# Altium PCB Board.PcbDoc
Units mm, origin at the board's own origin, x right, y up, seen from the top; angles counter-clockwise.
Board outline 74.9 x 75 mm, 2 copper layers (Top Layer, Bottom Layer); 40 components, 43 nets, 168 pads, 0 vias.
Unrouted connection lines stored in the file: 103.
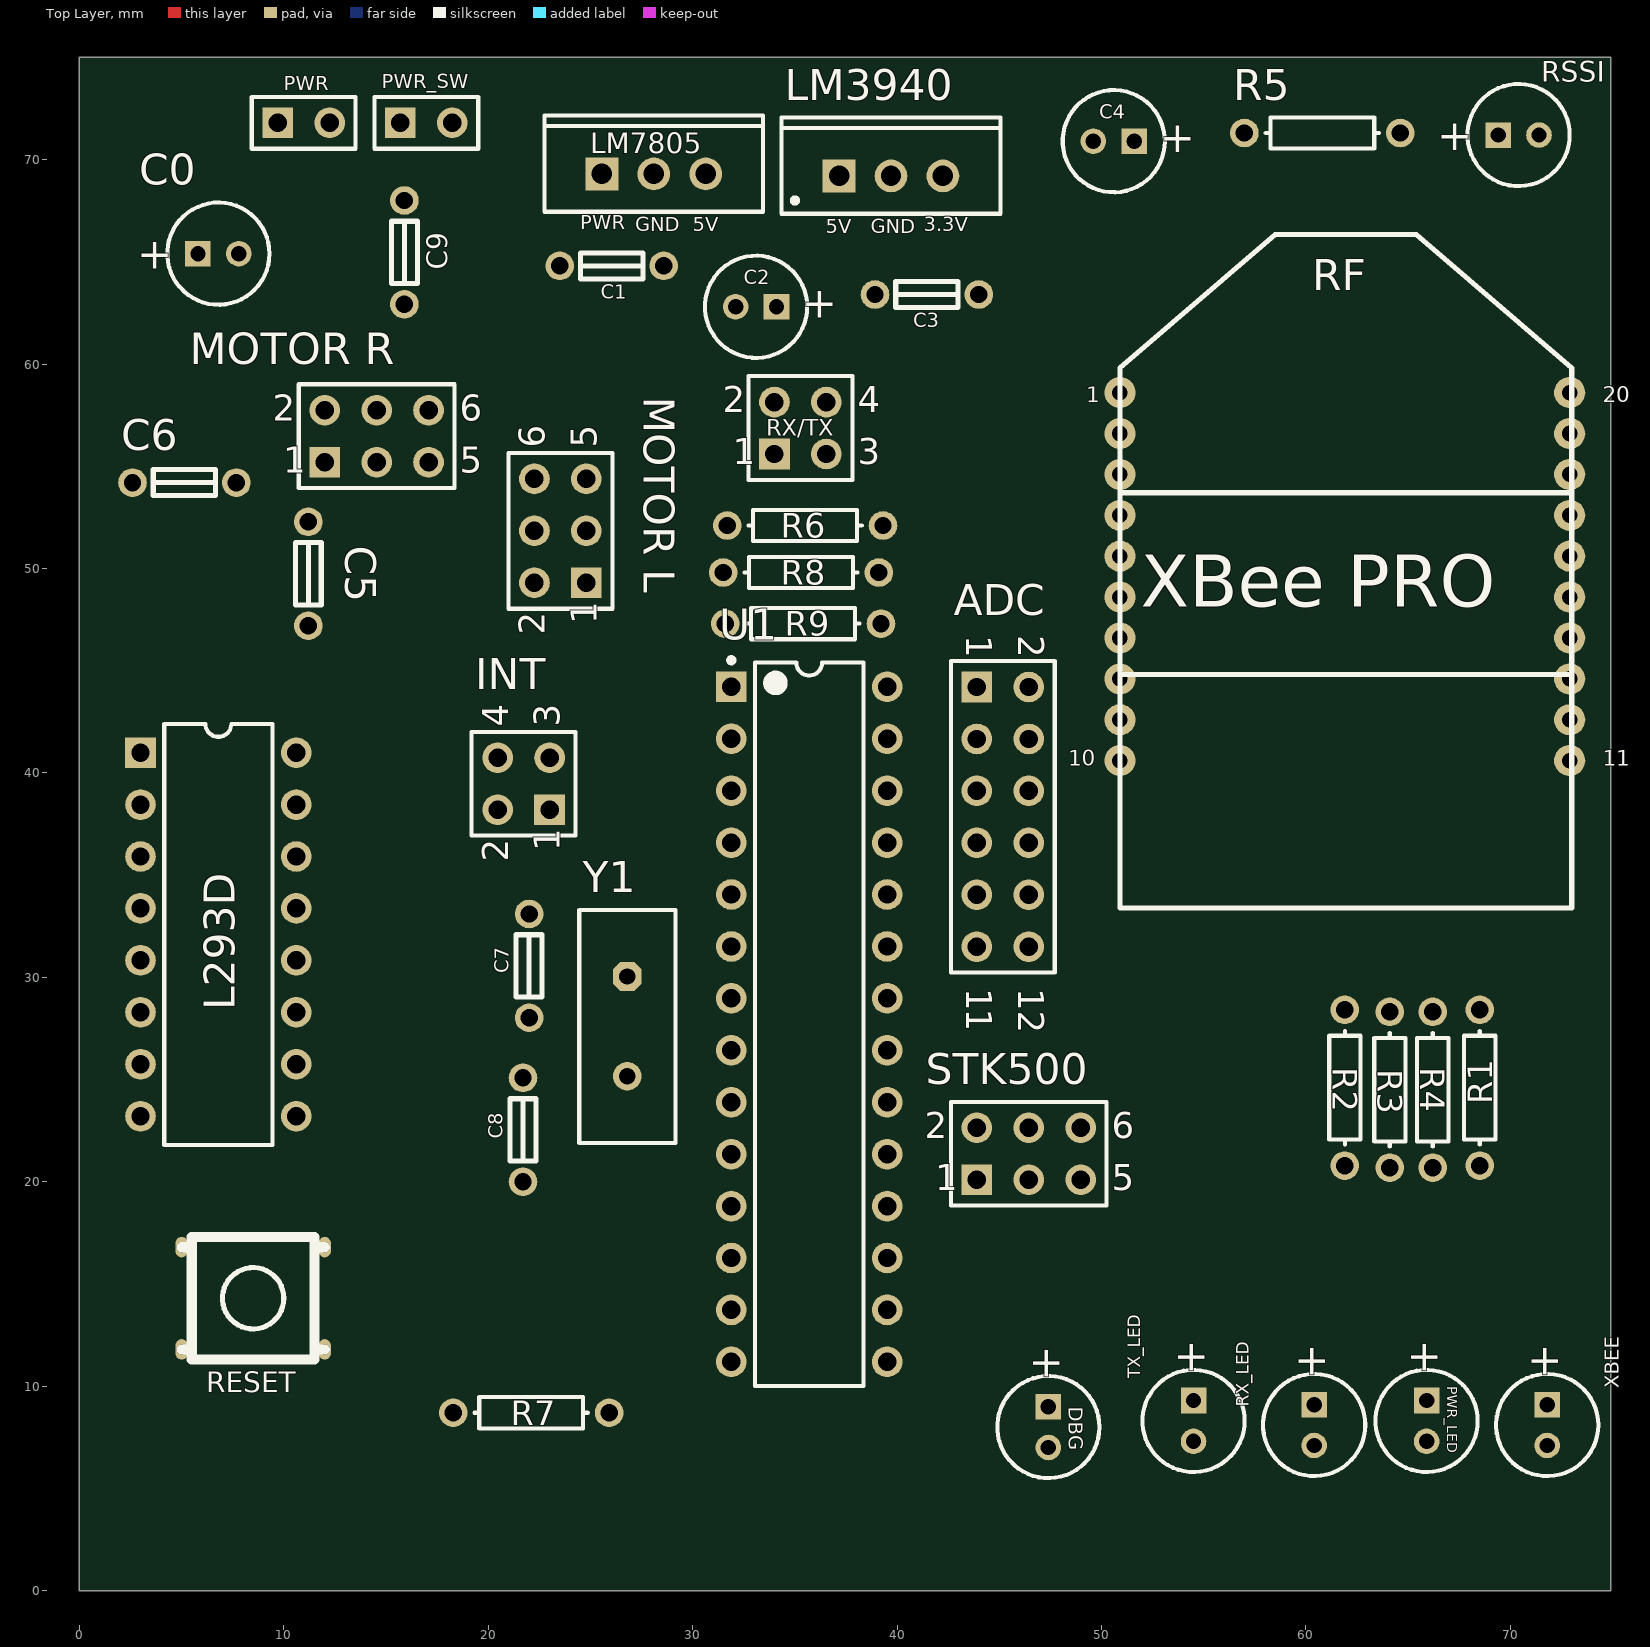
[diagram p0: Top Layer view]
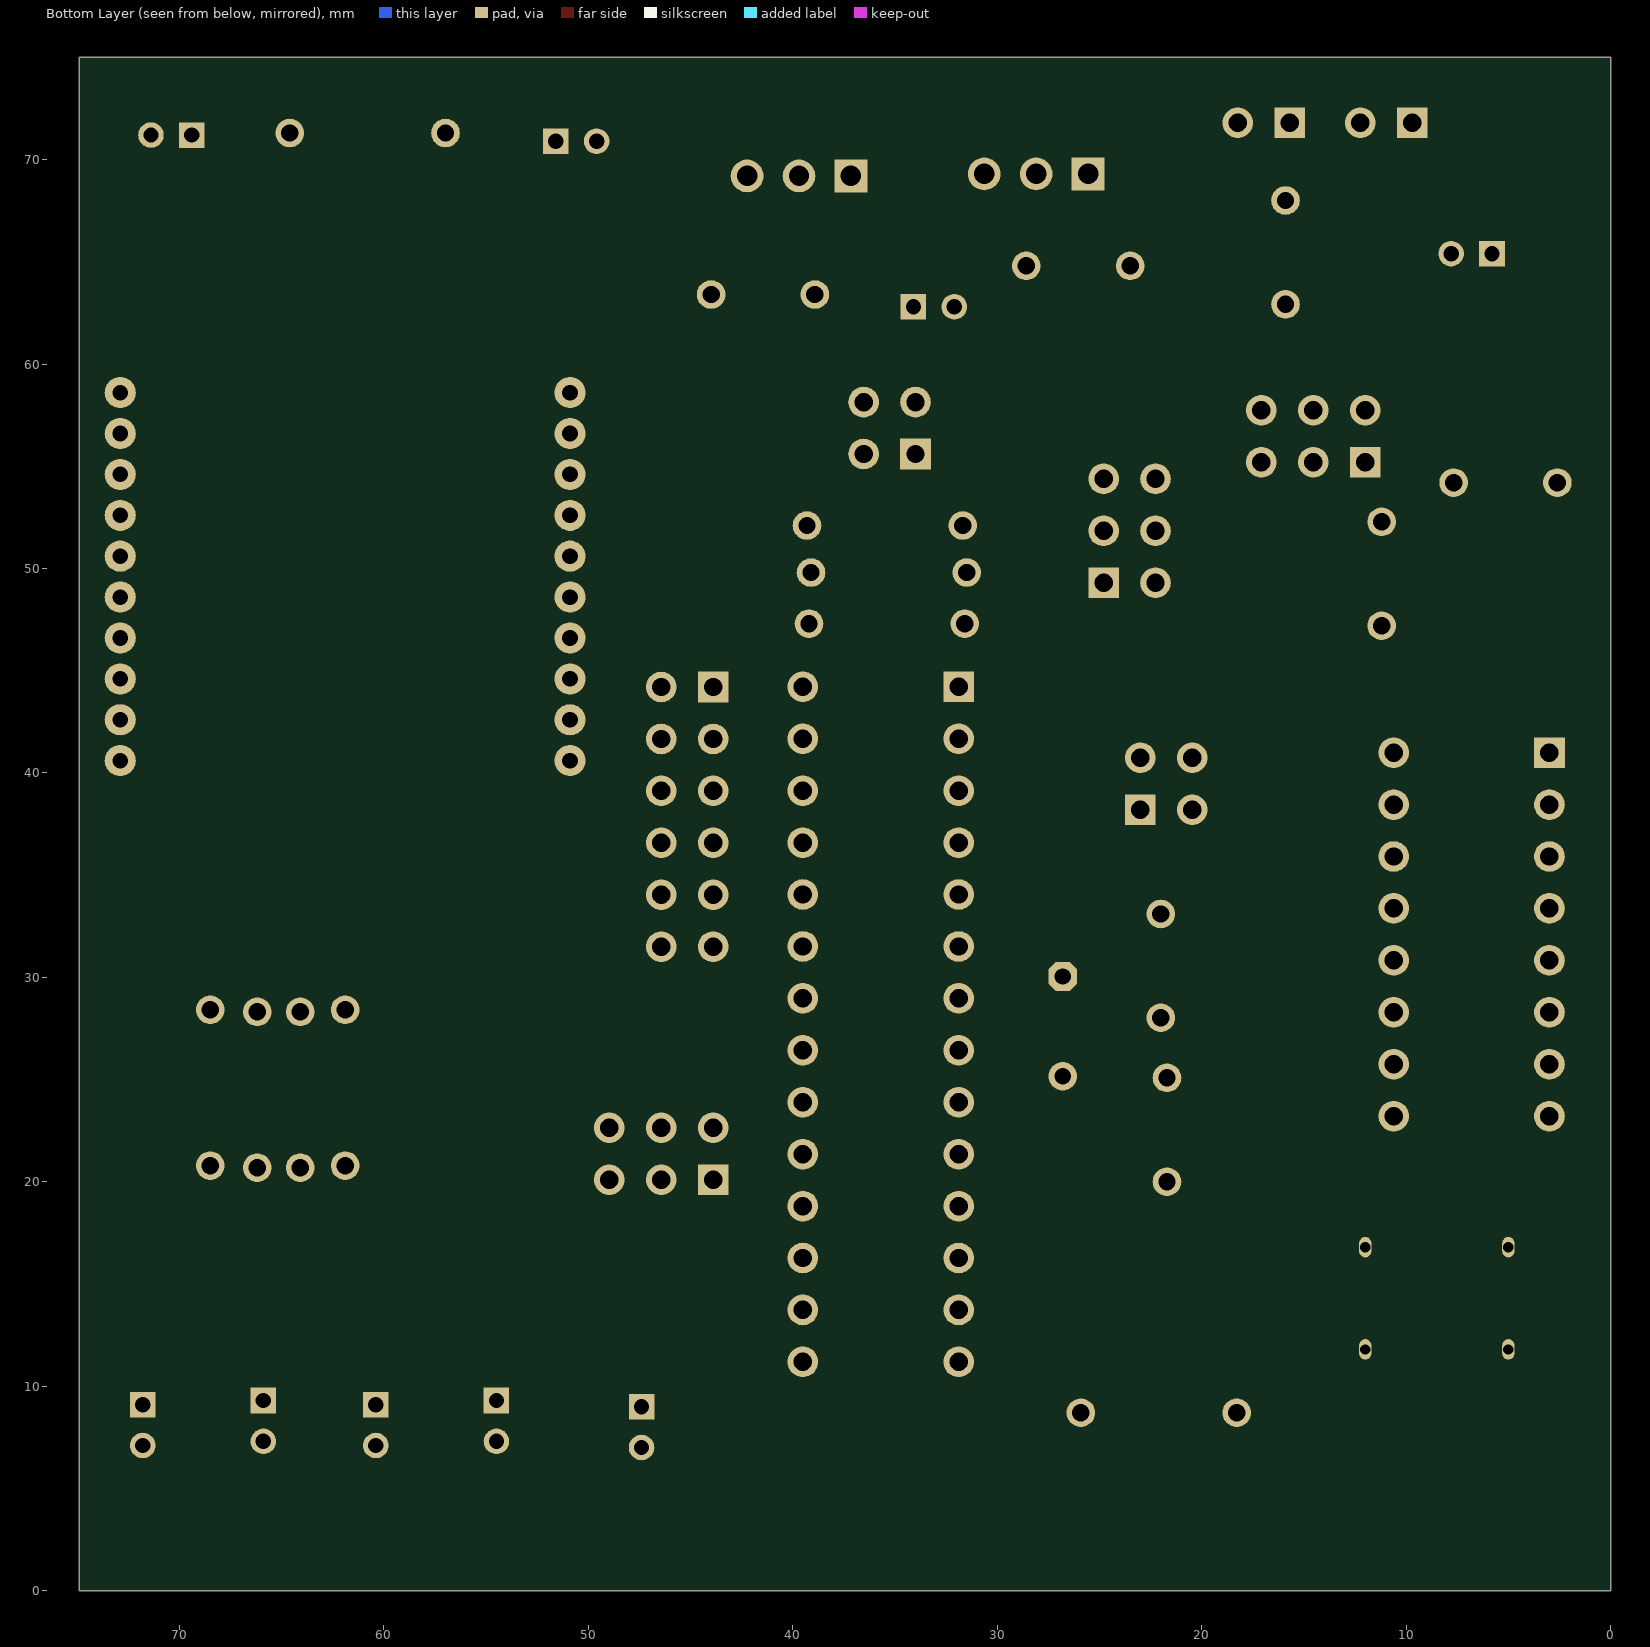
[diagram p1: Bottom Layer view, seen from below]

## Layer stack, top to bottom
Top Layer: signal copper 0.0356
Dielectric: dielectric 0.32, FR-4, Dk 4.8
Bottom Layer: signal copper 0.0356

## Board outline
0,0 0,75 74.9,75 74.9,0

## Design rules (kind name [scope] priority, off if disabled: settings)
Clearance [All] p1: gap=0.254
PolygonConnect [All] p1: connectstyle=Relief reliefconductorwidth=0.254 reliefentries=4 polygonreliefangle="90 Angle"
RoomDefinition Esquemático [InComponentClass('Esquemático')] p1: confinementstyle=ConfineIn formatcopy=TRUE lockcomponents=FALSE outline -5,-5 80,-5 80,80 -5,80
RoutingVias [All] p1: holewidth=0.711 width=1.27 viastyle="Through Hole" minholewidth=0.711 minwidth=1.27 maxholewidth=0.711 maxwidth=1.27
SilkscreenOverComponentPads [All] p1: minsilkscreentomaskgap=0.254
SolderMaskExpansion [All] p1: expansion=0.102
Width [All] p1: maxlimit=0.254 minlimit=0.254 preferedwidth=0.254
27 further rules are at their usual default settings.

## Components (designator, comment, footprint, x,y, rotation, side; value= is the part's Value field where it differs from the comment)
ADC "Header 6X2" HDR2X6 43.9,44.2 r270 top
C0 "Cap Pol1" B 6.8,65.4 r0 top
C1 "Cap" C_NANO_HOLES 23.5,64.8 r0 top
C2 "Cap Pol1" B 33.1,62.8 r180 top
C3 "Cap" C_NANO_HOLES 44,63.4 r180 top
C4 "Cap Pol1" B 50.6,70.9 r180 top
C5 "Cap" C_NANO_HOLES 11.2,47.2 r90 top
C6 "Cap" C_NANO_HOLES 2.6,54.2 r0 top
C7 "Cap" C_NANO_HOLES 22,33.1 r270 top
C8 "Cap" C_NANO_HOLES 21.7,20 r90 top
C9 "Cap" C_NANO_HOLES 15.9,68 r270 top
DBG "LED0" B 47.4,8 r270 top
INT "Header 2X2" HDR2X2 23,38.2 r90 top
L293D "L293D" DIP16 6.8,32.1 r270 top
LM3940 "LM3940IT-3.3" T03B 39.7,69.2 r0 top
LM7805 "µA7805CKC" KC03 28.1,69.3 r0 top
"MOTOR L" "Header 3X2 (2mm)" HDR2X3 24.8,49.3 r90 top
"MOTOR R" "Header 3X2 (2mm)" HDR2x3 12,55.2 r0 top
PWR "Header 2" HDR1X2 9.7,71.8 r0 top
PWR_LED "LED0" B 65.9,8.3 r270 top
PWR_SW "Header 2" HDR1X2 15.7,71.8 r0 top
R1 "" AXIAL-0.3 68.5,24.6 r270 top
R2 "" AXIAL-0.3 61.9,24.6 r270 top
R3 "" AXIAL-0.3 64.1,24.5 r270 top
R4 "" AXIAL-0.3 66.2,24.5 r270 top
R5 "" AXIAL-0.3 60.8,71.3 r0 top
R6 "" AXIAL-0.3 35.5,52.1 r180 top
R7 "" AXIAL-0.3 22.1,8.7 r180 top
R8 "" AXIAL-0.3 35.3,49.8 r180 top
R9 "" AXIAL-0.3 35.4,47.3 r180 top
RESET "SW-PB" PUSHBUTTON 11.5,17.3 r180 top
RF "XBee Pro 60mW" XBEE_PRO 50.9,40.6 r0 top
RSSI "LED0" B 70.4,71.2 r0 top
RX/TX "Header 2X2" HDR2X2 34,55.6 r0 top
RX_LED "LED0" B 60.4,8.1 r270 top
STK500 "Header 3X2" HDR2X3 43.9,20.1 r0 top
TX_LED "LED0" B 54.5,8.3 r270 top
U1 "ATmega8-16PI" 28P3 35.7,27.7 r0 top
XBEE "LED0" B 71.8,8.1 r270 top
Y1 "16MHz" HC-49U 26.8,27.6 r270 top

## Footprints (in the part's own frame and the unit in brackets; to place one, negate y for a bottom-side part, rotate by r counter-clockwise, add the part's x,y. Pads: shape width x height; smd on the part's side, far side on the other; paste and mask are expansions set on the pad)
28P3 [mm] "DIP, 28-Leads, Row Spacing 7.62mm, Pitch 2.54mm, Body 34.67x7.3mm"
  rect 1.5x1.5 hole 0.9: 1(-3.81,16.51)
  round 1.5 hole 0.9: 2(-3.81,13.97) 3(-3.81,11.43) 4(-3.81,8.89) 5(-3.81,6.35) 6(-3.81,3.81) 7(-3.81,1.27) 8(-3.81,-1.27) 9(-3.81,-3.81) 10(-3.81,-6.35) 11(-3.81,-8.89) 12(-3.81,-11.43) 13(-3.81,-13.97) 14(-3.81,-16.51) 15(3.81,-16.51) 16(3.81,-13.97) 17(3.81,-11.43) 18(3.81,-8.89) 19(3.81,-6.35) 20(3.81,-3.81) 21(3.81,-1.27) 22(3.81,1.27) 23(3.81,3.81) 24(3.81,6.35) 25(3.81,8.89) 26(3.81,11.43) 27(3.81,13.97) 28(3.81,16.51)
  silkscreen extent -3.93,-17.7 2.65,17.93, body extent -3.6,-17.65 3.6,17.65, height 4.58
AXIAL-0.3 [mm] "Axial Device, Thru-Hole; 2 Leads; 0.3 in Pin Spacing"
  round 1.4 hole 0.85: 1(-3.81,0) 2(3.81,0)
  silkscreen extent -2.77,-0.76 2.77,0.76
B [mm] "Capacitor, Electrolytic, Radial; Body 5 x 6.8 mm (Dia.xH typ); Pin Spacing 2 mm (typ)"
  rect 1.25x1.25 hole 0.75: 1(-1,0)
  round 1.25 hole 0.75: 2(1,0)
  silkscreen extent -2.5,-2.5 2.5,2.5
C_NANO_HOLES [mm] "C_NANO com furos maiores"
  round 1.4 hole 0.85: 1(0,0) 2(5.08,0)
  silkscreen extent 1.02,-0.64 4.06,0.64
DIP16 [mm] "DIP; 16 Leads; Row Spacing 7.62 mm; Pitch 2.54 mm"
  rect 1.5x1.5 hole 0.9: 1(-8.89,-3.81)
  round 1.5 hole 0.9: 2(-6.35,-3.81) 3(-3.81,-3.81) 4(-1.27,-3.81) 5(1.27,-3.81) 6(3.81,-3.81) 7(6.35,-3.81) 8(8.89,-3.81) 9(8.89,3.81) 10(6.35,3.81) 11(3.81,3.81) 12(1.27,3.81) 13(-1.27,3.81) 14(-3.81,3.81) 15(-6.35,3.81) 16(-8.89,3.81)
  silkscreen extent -10.3,-2.65 10.3,2.65
HC-49U [mm] "Quartz Crystal, Thru-Hole; 2 Leads; Body 11.35 x 4.65 x 13.46 mm (LxWxH max)"
  oct 1.4x1.4 hole 0.8: 1(-2.44,0)
  round 1.4 hole 0.8: 2(2.44,0)
  silkscreen extent -5.7,-2.35 5.7,2.35
HDR1X2 [mm] "Connector; Header; 2 Position"
  rect 1.5x1.5 hole 0.9: 1(0,0)
  round 1.5 hole 0.9: 2(2.54,0)
  silkscreen extent -1.27,-1.27 3.81,1.27
HDR2X2 [mm] "Connector; Header; 2x2 Position"
  rect 1.5x1.5 hole 0.9: 1(0,0)
  round 1.5 hole 0.9: 2(0,2.54) 3(2.54,0) 4(2.54,2.54)
  silkscreen extent -1.27,-1.27 3.81,3.81
HDR2X3 [mm] "Connector; Header; 3x2 Position"
  rect 1.5x1.5 hole 0.9: 1(0,0)
  round 1.5 hole 0.9: 2(0,2.54) 3(2.54,0) 4(2.54,2.54) 5(5.08,0) 6(5.08,2.54)
  silkscreen extent -1.27,-1.27 6.35,3.81
HDR2x3 [mm] "Connector; Header; 3x2 Position"
  rect 1.5x1.5 hole 0.9: 1(0,0)
  round 1.5 hole 0.9: 2(0,2.54) 3(2.54,0) 4(2.54,2.54) 5(5.08,0) 6(5.08,2.54)
  silkscreen extent -1.27,-1.27 6.35,3.81
HDR2X6 [mm] "Connector; Header; 6x2 Position"
  rect 1.5x1.5 hole 0.9: 1(0,0)
  round 1.5 hole 0.9: 2(0,2.54) 3(2.54,0) 4(2.54,2.54) 5(5.08,0) 6(5.08,2.54) 7(7.62,0) 8(7.62,2.54) 9(10.16,0) 10(10.16,2.54) 11(12.7,0) 12(12.7,2.54)
  silkscreen extent -1.27,-1.27 13.97,3.81
KC03 [mm] "TO, Thru-Hole, Vertical, Heatsink Mounted; 3 In-Line Leads; Pitch 2.54 mm"
  rect 1.6x1.6 hole 1: 1(-2.54,0)
  round 1.6 hole 1: 2(0,0) 3(2.54,0)
  silkscreen extent -5.35,-1.85 5.35,2.85
PUSHBUTTON [mm]
  oval 0.6x1 hole 0.5: 1(-0.5,5.5) 1(-0.5,0.5) 2(6.5,5.5) 2(6.5,0.5)
  silkscreen extent -0.5,0 6.5,6
T03B [mm] "TO, Thru-Hole, Vertical, Heatsink Mounted; 3 In-Line Leads; Pitch 2.54 mm"
  rect 1.6x1.6 hole 1: 1(-2.54,0)
  round 1.6 hole 1: 2(0,0) 3(2.54,0)
  silkscreen extent -5.35,-1.85 5.35,2.85, body extent -5.4,-1.9 5.4,2.9, height 19.4
XBEE_PRO [mil]
  round 60 hole 30: 1(0,708.66) 2(0,629.92) 3(0,551.18) 4(0,472.44) 5(0,393.7) 6(0,314.96) 7(0,236.22) 8(0,157.48) 9(0,78.74) 10(0,0) 11(866.14,0) 12(866.14,78.74) 13(866.14,157.48) 14(866.14,236.22) 15(866.14,314.96) 16(866.14,393.7) 17(866.14,472.44) 18(866.14,551.18) 19(866.14,629.92) 20(866.14,708.66)
  silkscreen extent 0,-284 870,1013

## Part data
ADC: "Header, 6-Pin, Dual row"
C0 C2 C4: "Polarized Capacitor (Radial)"
C1 C3 C5 C6 C7 C8 C9: "Capacitor"
DBG PWR_LED RSSI RX_LED TX_LED XBEE: "Typical INFRARED GaAs LED"
INT RX/TX: "Header, 2-Pin, Dual row"
L293D: "Push-Pull Four Channel Driver With Diode"
LM3940: "1A Low Dropout Regulator for 5V to 3.3V Conversion"
LM7805: "Positive-Voltage Regulator"
"MOTOR L" "MOTOR R": library part "Header 3X2", "Header, 3-Pin, Dual row"
PWR PWR_SW: "Header, 2-Pin"
R1 R2 R3 R4 R5 R6 R7 R8 R9: library part Res1, "Resistor"
RESET: "Switch"
RF: library part XBee
STK500: "Header, 3-Pin, Dual row"
U1: "8-Bit AVR Microcontroller with 8K Bytes of In-System Programmable Flash Memory"
Y1: library part ECS-120-32-1, "Crystal Oscillator"

## Nets (pads, with @x,y where several pads share a name; then routed paths per layer and width w, separated by ;. In a path a pad name is that pad's centre, name@x,y a point inside that pad or via, vN(x,y) a via of type N, cw(c..) or ccw(c..) an arc to the next point about the centre after c; other vN are vias at no path point)
3V3: C4.1 LM3940.3 RF.1
5V: "MOTOR L.4" "MOTOR R.4" C2.1 C3.1 C5.1 L293D.16 LM3940.1 LM7805.3 R7.2 STK500.2 U1.7 U1.20 U1.21
ADC0: ADC.11 U1.23
ADC1: ADC.9 U1.24
ADC2: ADC.7 U1.25
ADC3: ADC.5 U1.26
ADC4: ADC.3 U1.27
ADC5: ADC.1 R6.1 U1.28
AL: "MOTOR L.6" U1.4
AR: "MOTOR R.6" U1.5
BL: "MOTOR L.5" U1.6
BR: "MOTOR R.5" U1.11
CL: L293D.2 STK500.4 U1.17
CR: L293D.10 STK500.1 U1.18
DL: L293D.7 U1.14
DR: L293D.15 STK500.3 U1.19
ENL: L293D.1 U1.15
ENR: L293D.9 U1.16
GND: "MOTOR L.3" "MOTOR R.3" ADC.2 ADC.4 ADC.6 ADC.8 ADC.10 ADC.12 C0.2 C1.2 C2.2 C3.2 C4.2 C7.2 C8.2 C9.2 DBG.2 INT.2 INT.4 L293D.4 L293D.5 L293D.12 L293D.13 LM3940.2 LM7805.2 PWR_SW.2 R9.2 RESET.2 RF.10 RSSI.2 RX/TX.2 RX/TX.4 RX_LED.2 STK500.6 TX_LED.2 U1.8 U1.22
INT0: U1.12
INT1: U1.13
L+: "MOTOR L.2" L293D.3
L-: "MOTOR L.1" L293D.6
NetC5_2: C5.2 C6.2
NetC9_1: C9.1 PWR.2 PWR_SW.1
NetDBG_1: DBG.1 R6.2
NetPWR_LED_1: PWR_LED.1 R4.2
NetR1_2: R1.2 XBEE.1
NetR2_2: R2.2 TX_LED.1
NetR3_2: R3.2 RX_LED.1
NetR5_2: R5.2 RSSI.1
NetR7_1: R7.1 RESET.1
NetR8_1: R8.1 R9.1 RF.3
PWR: C0.1 C1.1 C6.1 L293D.8 LM7805.1 PWR.1
R+: "MOTOR R.2" L293D.11
R-: "MOTOR R.1" L293D.14
RSSI: R5.1
RST: STK500.5 U1.1
RXD: R3.1 RF.2 U1.2
TXD: R2.1 R8.2 U1.3
XBEE: R1.1 RF.15
XTAL1: C7.1 U1.9 Y1.1
XTAL2: C8.1 U1.10 Y1.2
pads on no net: INT.1 INT.3 PWR_LED.2 R4.1 RF.4 RF.5 RF.6 RF.7 RF.8 RF.9 RF.11 RF.12 RF.13 RF.14 RF.16 RF.17 RF.18 RF.19 RF.20 RX/TX.1 RX/TX.3 XBEE.2

## Silkscreen, mask and mechanical layers (free items; w line width, h text height)
Top Overlay:
  text "3.3V" at 41.3,66.5 h0.7
  text "5V" at 36.5,66.4 h0.7
  text "GND" at 38.7,66.4 h0.7

## Text inside footprints (layer, text, board x,y; h text height)
ADC: Top Overlay "12" at 45.932,29.468 h1.27 r270; Top Overlay "1" at 43.392,28.452 h1.27 r270; Top Overlay "1" at 43.392,29.468 h1.27 r270; Top Overlay "1" at 43.392,46.74 h1.27 r270; Top Overlay "2" at 45.932,46.74 h1.27 r270
C0: Top Overlay "+" at 2.825,64.65 h1.5
C2: Top Overlay "+" at 37.075,63.55 h1.5 r180
C4: Top Overlay "+" at 54.575,71.65 h1.5 r180
DBG: Top Overlay "+" at 46.65,11.975 h1.5 r270
INT: Top Overlay "1" at 23.508,36.168 h1.27 r90; Top Overlay "2" at 20.968,35.66 h1.27 r90; Top Overlay "4" at 20.968,42.264 h1.27 r90; Top Overlay "3" at 23.508,42.264 h1.27 r90
LM7805: Top Overlay "GND" at 27.2,66.5 h0.7; Top Overlay "PWR" at 24.5,66.6 h0.7; Top Overlay "5V" at 30,66.5 h0.7
"MOTOR L": Top Overlay "6" at 22.768,55.904 h1.27 r90; Top Overlay "5" at 25.308,55.904 h1.27 r90; Top Overlay "2" at 22.768,46.76 h1.27 r90; Top Overlay "1" at 25.308,47.268 h1.27 r90
"MOTOR R": Top Overlay "1" at 9.968,54.692 h1.27; Top Overlay "2" at 9.46,57.232 h1.27; Top Overlay "5" at 18.604,54.692 h1.27; Top Overlay "6" at 18.604,57.232 h1.27
PWR_LED: Top Overlay "+" at 65.15,12.275 h1.5 r270
RF: Top Overlay "XBee PRO" at 51.916,48.118 h2.54; Top Overlay "1" at 49.249,58.126 h0.76; Top Overlay "10" at 48.36,40.346 h0.76; Top Overlay "20" at 74.522,58.126 h0.76; Top Overlay "11" at 74.522,40.346 h0.76
RSSI: Top Overlay "+" at 66.425,70.45 h1.5
RX/TX: Top Overlay "1" at 31.968,55.092 h1.27; Top Overlay "2" at 31.46,57.632 h1.27; Top Overlay "4" at 38.064,57.632 h1.27; Top Overlay "3" at 38.064,55.092 h1.27
RX_LED: Top Overlay "+" at 59.65,12.075 h1.5 r270
STK500: Top Overlay "6" at 50.504,22.132 h1.27; Top Overlay "5" at 50.504,19.592 h1.27; Top Overlay "2" at 41.36,22.132 h1.27; Top Overlay "1" at 41.868,19.592 h1.27
TX_LED: Top Overlay "+" at 53.75,12.275 h1.5 r270
XBEE: Top Overlay "+" at 71.05,12.075 h1.5 r270